# Altium PCB Switch.PcbDoc
Units mm, origin at the board's own origin, x right, y up, seen from the top; angles counter-clockwise.
Board outline 74.3 x 44.45 mm, 2 copper layers (Top Layer, Bottom Layer); 9 components, 10 nets, 40 pads, 0 vias.
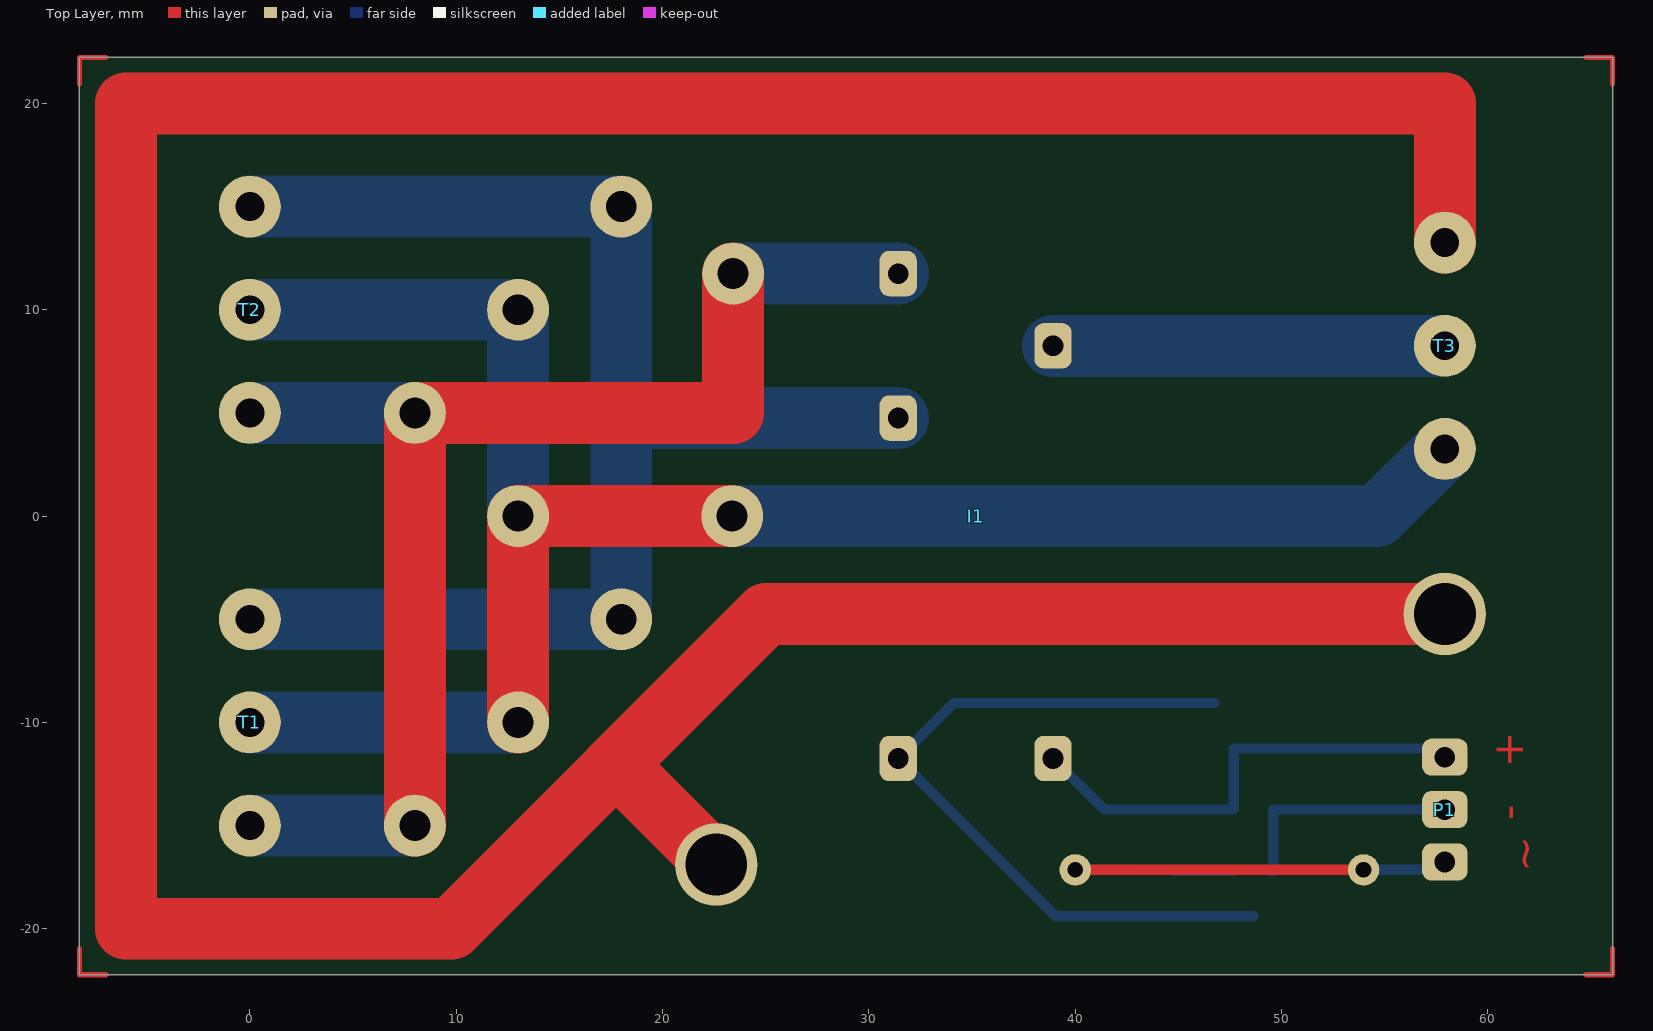
[diagram p0: Top Layer view]
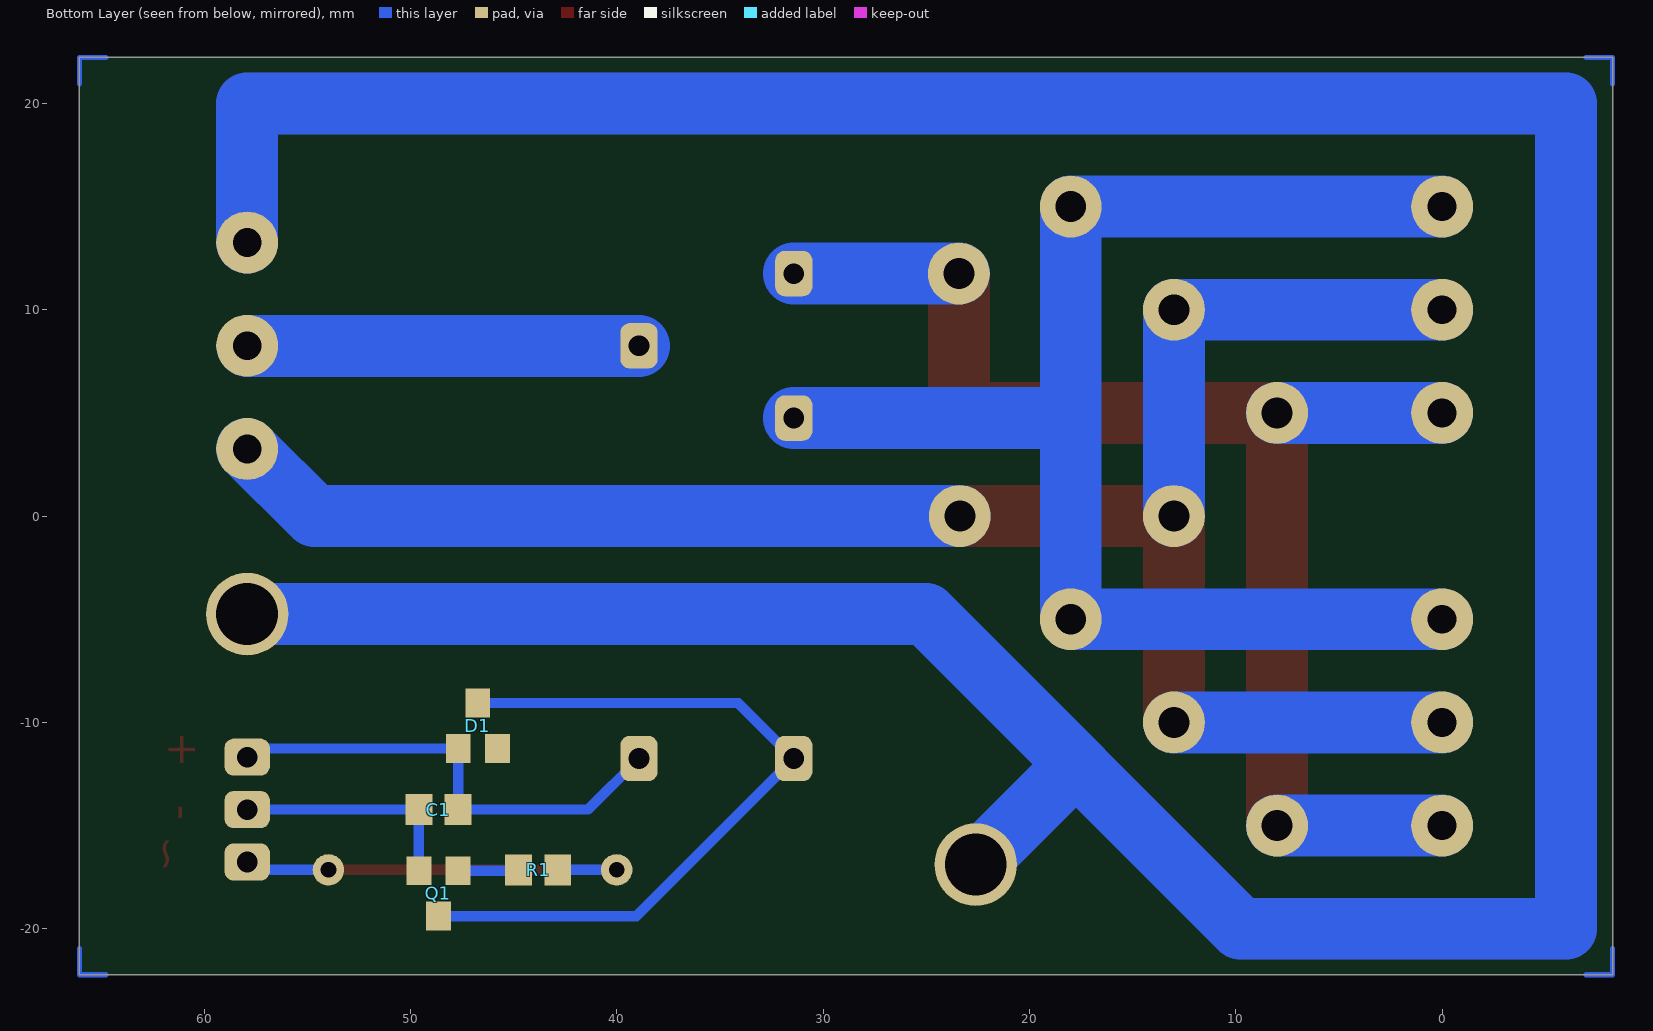
[diagram p1: Bottom Layer view, seen from below]
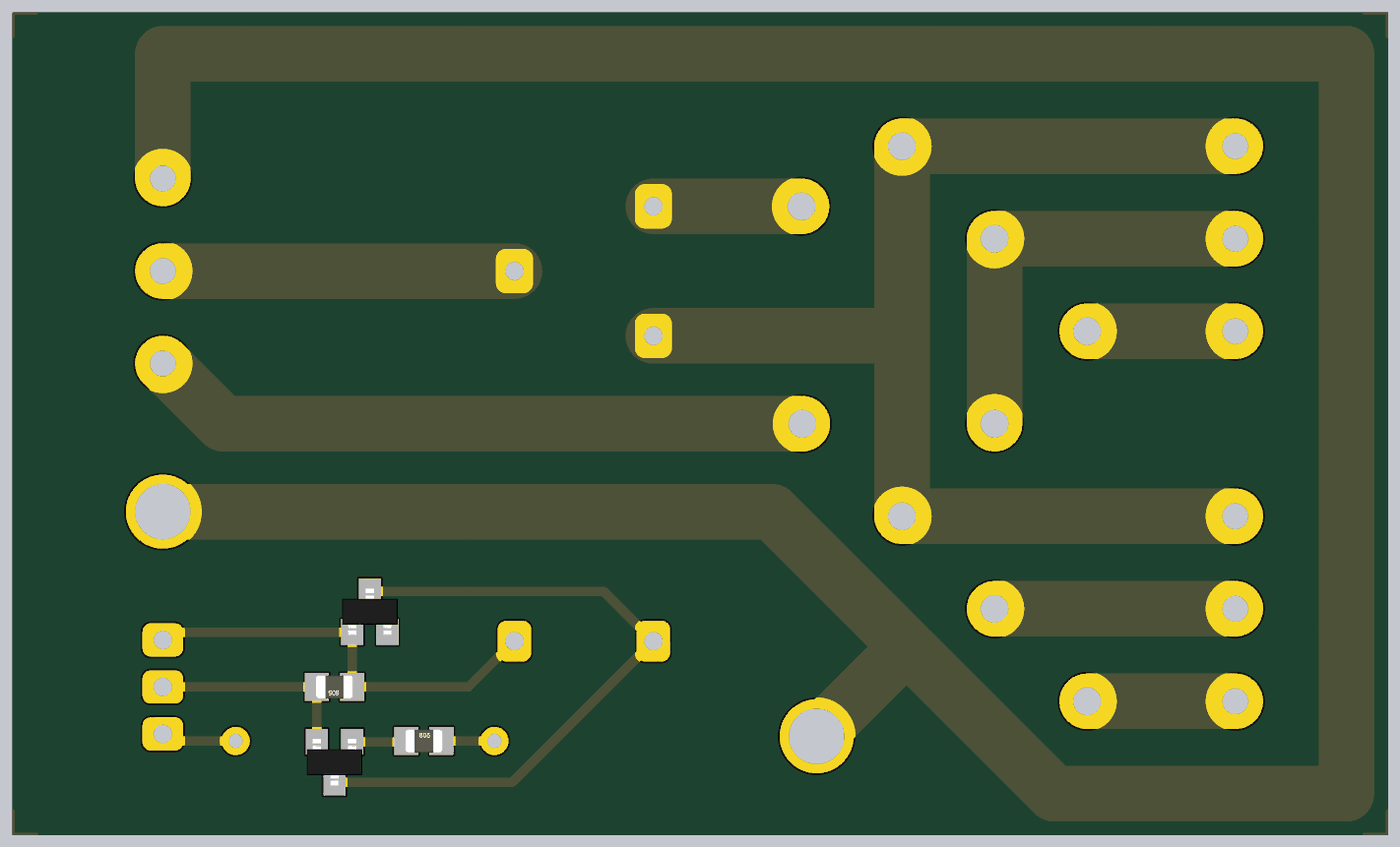
[diagram p2: 3D render of the assembled board from below, using the file's embedded part models]

## Layer stack, top to bottom
Top Layer: signal copper 0.0356
Dielectric: dielectric 0.32, FR-4, Dk 4.8
Bottom Layer: signal copper 0.0356

## Board outline
-8.255,-22.225 66.04,-22.225 66.04,22.225 -8.255,22.225 -8.255,-22.225

## Design rules (kind name [scope] priority, off if disabled: settings)
Clearance [All] p1: gap=0.254
PolygonConnect [All] p1: connectstyle=Relief reliefconductorwidth=0.254 reliefentries=4 polygonreliefangle="90 Angle" airgapwidth=0.254
RoomDefinition Switch [InComponentClass('Switch')] p1: confinementstyle=ConfineIn formatcopy=TRUE lockcomponents=FALSE outline -8.255,-22.225 66.04,-22.225 66.04,22.225 -8.255,22.225
RoutingVias [All] p1: holewidth=0.711 width=1.27 viastyle="Through Hole" minholewidth=0.711 minwidth=1.27 maxholewidth=0.711 maxwidth=1.27
SilkscreenOverComponentPads [All] p1: minsilkscreentomaskgap=0.254
SolderMaskExpansion [All] p1: expansion=0.102
Width [All] p1: maxlimit=5 minlimit=0.254 preferedwidth=5
27 further rules are at their usual default settings.

## Components (designator, comment, footprint, x,y, rotation, side; value= is the part's Value field where it differs from the comment)
C1 "100nF" SMD-0805 48.641,-14.224 r0 bottom
D1 "BAS16" SOT-23 46.736,-10.16 r270 bottom
I1 "I-LM1-5D" LM1-5D 35.174,0 r180 top
P1 "Pins 3" THT3-254 57.912,-14.224 r270 top
Q1 "BC846B" SOT-23 48.641,-18.288 r90 bottom
R1 "1K" SMD-0805 43.815,-17.145 r180 bottom
T1 "DG126-5.0-03P-14-00A(H)" DG126-5.0-03P-14-00A(H) 0,-10 r90 top
T2 "DG126-5.0-03P-14-00A(H)" DG126-5.0-03P-14-00A(H) 0,10 r90 top
T3 "DG126-5.0-03P-14-00A(H)" DG126-5.0-03P-14-00A(H) 57.912,8.255 r90 top

## Footprints (in the part's own frame and the unit in brackets; to place one, negate y for a bottom-side part, rotate by r counter-clockwise, add the part's x,y. Pads: shape width x height; smd on the part's side, far side on the other; paste and mask are expansions set on the pad)
DG126-5.0-03P-14-00A(H) [mm] "Connector 3 PIN"
  round 3 hole 1.4: 1(5,0) 2(0,0) 3(-5,0)
LM1-5D [mm] "Releu: electromagnetic;"
  rrect50% 1.8x2.2 hole 1: 1(-3.75,11.75) 2(3.75,11.75) 3(-3.75,-8.25) 4(3.75,-4.75) 5(3.75,-11.75)
SMD-0805 [mm]
  rect 1.3x1.5 smd: 1(-0.95,0) 2(0.95,0)
  body extent -1,-0.62 1,0.63, height 0.78
SOT-23 [mm]
  rect 1.4x1.2 smd: 1(1.1,-0.95) 2(1.1,0.95) 3(-1.1,0)
  body extent -1.25,-1.5 1.25,1.5, height 1.1
THT3-254 [mm] "THT, 3 slot, 2.54mm"
  rrect50% 1.8x2.2 hole 1: 1(-2.54,0) 2(0,0) 3(2.54,0)

## Part data
C1: library part C-100nF-0805, "Condensator: ceramic; 100nF; 50V; X7R; ±10%; SMD; 0805; -55÷125°C"
D1: "Dioda: comutatie; 75V; 50mA; 100mA; SOT23; 6ns"
I1: "Releu: electromagnetic; SPDT; Ubobina:5VDC; 12A/250VAC; 12A/30VDC"
Q1: "Tranzistor: bipolar, NPN; 65V; 100mA; SOT23"
R1: library part R-1K-0805, "Rezistor: thick film; SMD; 0805; 1kO; 0,125W; ±5%; -55÷155°C"
T1 T2 T3: "Connector"

## Free pads (board coordinates)
  round 1.524 hole 0.762: 0(40.005,-17.145) 0(53.975,-17.145)
  round 3 hole 1.5: 1(8,-15) 1(8,5) 1(13,-10) 1(13,0) 1(13,10) 1(18,-5) 1(18,15) 1(23.378,0) 1(23.424,11.75)
  round 4 hole 3: 1(22.606,-16.891) 1(57.912,-4.75)

## Nets (pads, with @x,y where several pads share a name; then routed paths per layer and width w, separated by ;. In a path a pad name is that pad's centre, name@x,y a point inside that pad or via, vN(x,y) a via of type N, cw(c..) or ccw(c..) an arc to the next point about the centre after c; other vN are vias at no path point)
220V_L: I1.3 T3.2 | length 19
  Bottom Layer w0.254: T3.2@57.907,8.25 T3.2
  Bottom Layer w3: I1.3 T3.2@57.907,8.25
220V_N: pad.1@13,0 pad.1@13,10 pad.1@13,-10 pad.1@23.378,0 T1.2 T2.2 T3.3 | length 92.3
  Top Layer w3: pad.1@13,-10 13,0 pad.1@23.378,0
  Bottom Layer w3: T1.2 pad.1@13,-10 ; T2.2 13,10 pad.1@13,0 ; pad.1@23.378,0 54.657,0 T3.3
+5V: C1.1 D1.1 I1.1 P1.1 | length 23.2
  Bottom Layer w0.254: D1.1 D1.1@47.691,-11.265
  Bottom Layer w0.5: I1.1 41.398,-14.224 C1.1 D1.1@47.691,-11.265 ; D1.1 57.488,-11.26 P1.1
-5V: C1.2 P1.2 Q1.2 | length 11.3
  Bottom Layer w0.5: Q1.2 C1.2 P1.2
GND: pad.1@22.606,-16.891 pad.1@57.912,-4.75 T3.1
NetD1_3: D1.3 I1.2 Q1.3 | length 36.8
  Bottom Layer w0.5: D1.3 34.114,-9.06 I1.2 39.062,-19.388 Q1.3
NetI1_4: I1.4 pad.1@18,15 pad.1@18,-5 T1.1 T2.1 | length 69.4
  Bottom Layer w0.254: 18,4.699 18.051,4.75
  Bottom Layer w3: T1.1 18,-5 18,4.699 18,15 T2.1 ; 18.051,4.75 I1.4
NetI1_5: I1.5 pad.1@8,5 pad.1@8,-15 pad.1@23.424,11.75 T1.3 T2.3 | length 66.2
  Top Layer w3: pad.1@8,-15 8,5 23.424,5 pad.1@23.424,11.75
  Bottom Layer w3: T1.3 pad.1@8,-15 ; T2.3 pad.1@8,5 ; pad.1@23.424,11.75 I1.5
NetQ1_1: Q1.1 R1.1 | length 2.9
  Bottom Layer w0.254: R1.1 R1.1@44.808,-17.188
  Bottom Layer w0.5: R1.1@44.808,-17.188 Q1.1
VCMD: P1.3 pad.0 R1.2 | length 20.9
  Top Layer w0.5: pad.0@40.005,-17.145 pad.0@53.975,-17.145
  Bottom Layer w0.5: pad.0@40.005,-17.145 R1.2 ; pad.0@53.975,-17.145 57.531,-17.145 P1.3
pads on no net: D1.2

## Other copper
Top Layer:
  text "+" at 61.722,-12.192 h1.52 r90
  text "-" at 61.722,-14.732 h1.52 r90
  text "~" at 62.484,-17.272 h1.52 r90
Multi-Layer:
  lines w0.254: -8.255,-20.955 -8.255,-22.225 -6.985,-22.225 ; -8.255,20.955 -8.255,22.225 -6.985,22.225 ; 64.77,-22.225 66.04,-22.225 66.04,-20.955 ; 64.77,22.225 66.04,22.225 66.04,20.955
  lines w3 net GND: 17.742,-12.027 22.606,-16.891 ; 57.912,-4.75 25.019,-4.75 9.769,-20 -6,-20 -6,20 57.912,20 57.912,13.255